# EAGLE board ESP_Breakout (EAGLE 6.4)
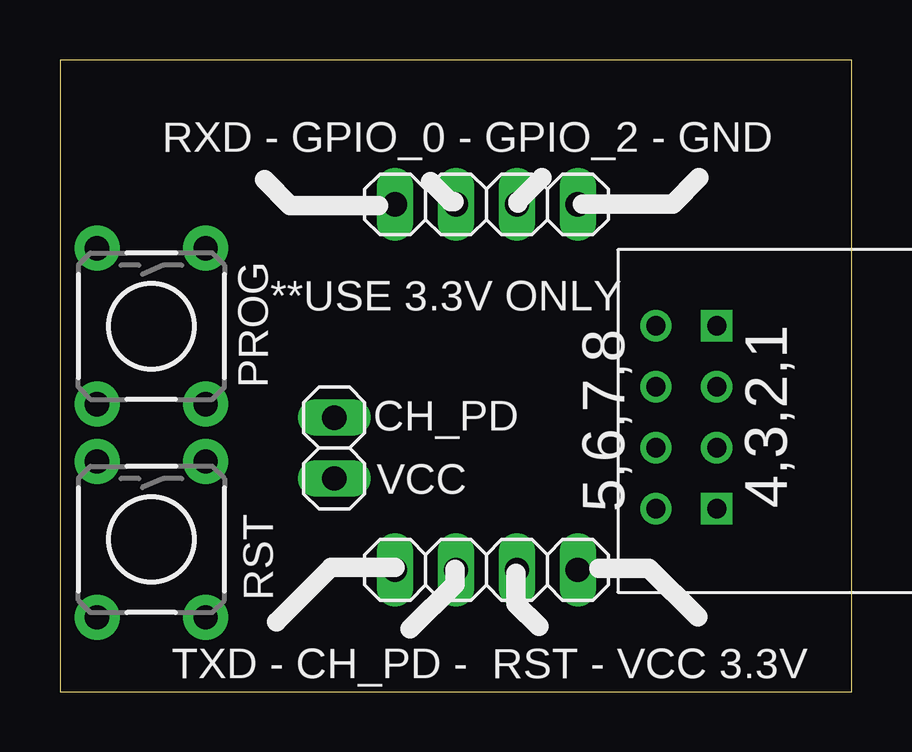
[diagram p0: board, top side]
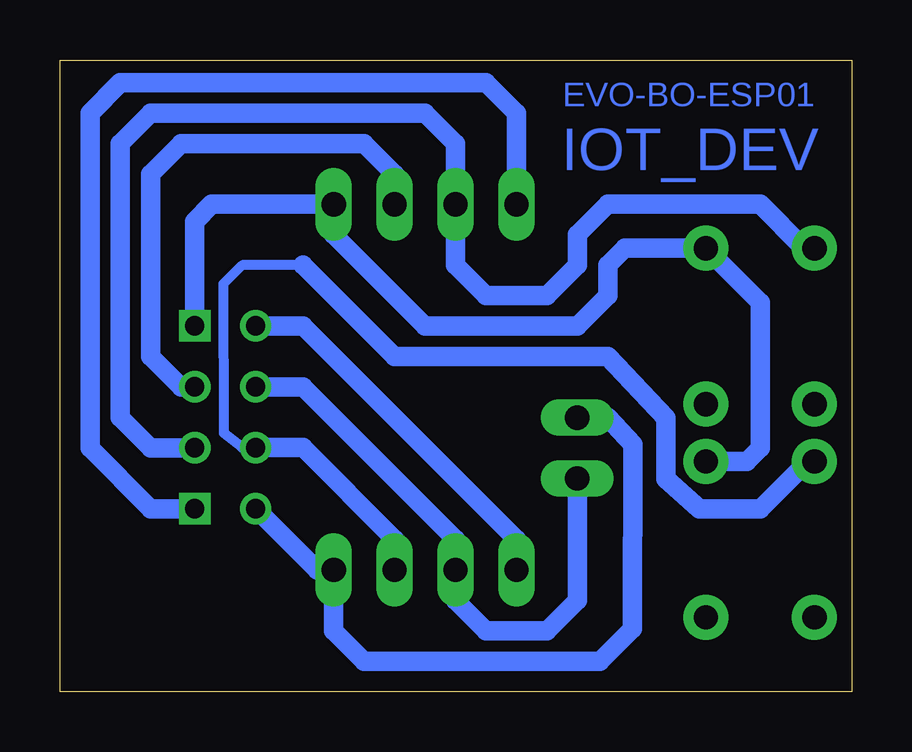
[diagram p1: board, bottom side, seen from below]

Size 33 x 26.34 mm. Coordinates in mm from the lower left corner, seen from the top.
Outline: 0,0 33,0 33,26.34 0,26.34 0,0
Copper layers (1*16): Top 0.035mm / dielectric 1.5mm / Bottom 0.035mm
Design rules "default": minimum track width 10mil, minimum drill 24mil, track to track 8mil, track to pad 8mil, pad to pad 8mil, via to via 8mil, smd to smd 8mil, copper to edge 40mil, drill to drill 8mil, minimum pad ring 10mil, minimum via ring 8mil, stop-mask expansion 4mil, vias tented up to drill 0mil, thermal gap 10mil

## Footprints (pad centres in the part's own frame; a part is rotated, then mirrored left to right if it is on the bottom)
1X02 = drill 1.016 long: 1 -1.27,0; 2 1.27,0
1X04 = drill 1.016 long: 1 -3.81,0; 2 -1.27,0; 3 1.27,0; 4 3.81,0
TACTILE_SWITCH_PTH_6.0MM = drill 1.016 pad 1.88: 1 -3.251,2.261; 2 3.251,2.261; 3 -3.251,-2.261; 4 3.251,-2.261
ESP01 = drill 0.8: CH_PD -1.285,-8.178; GPIO0 1.255,-5.638; GPIO2 -1.285,-5.638; RST 1.255,-8.178; TX -3.825,-8.178; VCC 3.795,-8.178 | drill 0.8 square: GND -3.825,-5.638; RX 3.795,-5.638

## Placement (x,y rotation side)
CH_PD  [1X02]  11.43,10.16 270 top
JP1  [1X04]  17.78,20.32 0 top
JP2  [1X04]  17.78,5.08 0 top
S1  PROG  [TACTILE_SWITCH_PTH_6.0MM]  3.81,15.24 270 top
S2  RST  [TACTILE_SWITCH_PTH_6.0MM]  3.81,6.35 270 top
U$1  ESP01_BREAKOUT  [ESP01]  33.02,11.43 270 top

## Library data of the parts
CH_PD JP1 JP2 = pinhead
S1 S2 = SparkFun-Switches; PROD_ID: SWCH-08441; SF_SKU: COM-00097
U$1 = esp8266modules

## Nets
N$1: JP1.4 S1.1 S2.1 U$1.GND
N$2: JP1.3 U$1.GPIO2
N$3: JP1.2 S1.3 U$1.GPIO0
N$4: JP1.1 U$1.RX
N$5: JP2.1 U$1.TX
N$6: CH_PD.2 JP2.2 U$1.CH_PD
N$7: JP2.3 S2.3 U$1.RST
N$8: CH_PD.1 JP2.4 U$1.VCC

## Tracks (layer width: path | path; a pad name or v marks a point on that pad's centre or on a via)
N$1
  Bottom 0.813: U$1.GND 27.38,19.61 26.67,20.32 JP1.4 21.59,19.05 17.78,15.24 11.43,15.24 10.16,16.51 10.16,17.78 9.45,18.49 S1.1 3.81,16.23 3.81,10.16 4.37,9.6 S2.1
N$2
  Bottom 0.813: JP1.3 19.05,21.59 20.32,22.86 27.94,22.86 29.21,21.59 29.21,13.97 27.94,12.7 27.4,12.7 U$1.GPIO2
N$3
  Bottom 0.813: U$1.GPIO0 27.4,10.16 29.21,10.16 30.48,11.43 30.48,22.86 29.21,24.13 17.78,24.13 16.51,22.86 JP1.2 16.51,17.78 15.24,16.51 12.7,16.51 11.43,17.78 11.43,19.05 10.16,20.32 3.81,20.32 1.98,18.49 S1.3
N$4
  Bottom 0.813: JP1.1 13.97,24.13 15.24,25.4 30.48,25.4 31.75,24.13 31.75,10.16 29.21,7.62 27.4,7.62 U$1.RX
N$5
  Bottom 0.813: U$1.TX 22.88,15.25 13.97,6.35 JP2.1
N$6
  Bottom 0.813: U$1.CH_PD 24.83,12.7 22.86,12.7 16.51,6.35 JP2.2 16.51,3.81 15.24,2.54 12.7,2.54 11.43,3.81 CH_PD.2
N$7
  Bottom 0.406: 22.86,17.78 25.4,17.78 26.18,17.02 26.16,10.77 25.41,10.18 U$1.RST
  Bottom 0.813: JP2.3 19.05,6.35 22.88,10.18 U$1.RST | S2.3 1.83,9.6 3.81,7.62 6.35,7.62 7.73,8.87 7.73,11.41 10.16,13.97 19.05,13.97 22.86,17.78
N$8
  Bottom 0.813: U$1.VCC 22.29,5.08 JP2.4 21.59,2.54 20.32,1.27 10.48,1.27 9.14,2.61 9.11,10.31 10.16,11.43 CH_PD.1

## Text on the board
Bottom: EVO-BO-ESP01 | IOT_DEV
tPlace: RXD - GPIO_0 - GPIO_2 - GND | **USE 3.3V ONLY | PROG | VCC | 5,6,7,8 | 4,3,2,1 | RST | TXD - CH_PD - RST - VCC 3.3V